# EAGLE board CT_schematic (EAGLE 7.6.0)

Size 100 x 80 mm. Coordinates in mm from the lower left corner, seen from the top.
Outline: 0,0 100,0 100,80 0,80 0,0
Copper layers (1*16): Top 0.035mm / dielectric 1.5mm / Bottom 0.035mm
Design rules "default": minimum track width 10mil, minimum drill 24mil, track to track 8mil, track to pad 8mil, pad to pad 8mil, via to via 8mil, smd to smd 8mil, copper to edge 40mil, drill to drill 8mil, minimum pad ring 10mil, minimum via ring 8mil, stop-mask expansion 4mil, vias tented up to drill 0mil, thermal gap 10mil

## Footprints (pad centres in the part's own frame; a part is rotated, then mirrored left to right if it is on the bottom)
C0603 = smd 0.8 x 0.8: 1 -0.762,0; 2 0.762,0
C0402 = smd 0.5 x 0.5: 1 -0.508,0; 2 0.508,0
C0805 = smd 1.2 x 1.3: 1 -1.016,0; 2 1.016,0
C1206 = smd 1.3 x 1.6: 1 -1.524,0; 2 1.524,0
C1210 = smd 1.2 x 2.5: 1 -1.524,0; 2 1.524,0
EXV-9H = smd 3.505 x 1.676: 1 -2.857,0; 2 2.857,0
L0603 = smd 0.8 x 0.8: 1 -0.762,0; 2 0.762,0
PJ-037B_PACKAGE = drill 3.7 square: 1 12,0 | drill 3.2 square: 2 6,0
R0603 = smd 0.8 x 0.8: 1 -0.762,0; 2 0.762,0
LQFP64 = smd 0.3 x 1.2: 1 -3.75,-5.75; 2 -3.25,-5.75; 3 -2.75,-5.75; 4 -2.25,-5.75; 5 -1.75,-5.75; 6 -1.25,-5.75; 7 -0.75,-5.75; 8 -0.25,-5.75; 9 0.25,-5.75; 10 0.75,-5.75; 11 1.25,-5.75; 12 1.75,-5.75; 13 2.25,-5.75; 14 2.75,-5.75; 15 3.25,-5.75; 16 3.75,-5.75; 33 3.75,5.75; 34 3.25,5.75; 35 2.75,5.75; 36 2.25,5.75; 37 1.75,5.75; 38 1.25,5.75; 39 0.75,5.75; 40 0.25,5.75; 41 -0.25,5.75; 42 -0.75,5.75; 43 -1.25,5.75; 44 -1.75,5.75; 45 -2.25,5.75; 46 -2.75,5.75; 47 -3.25,5.75; 48 -3.75,5.75 | smd 1.2 x 0.3: 17 5.75,-3.75; 18 5.75,-3.25; 19 5.75,-2.75; 20 5.75,-2.25; 21 5.75,-1.75; 22 5.75,-1.25; 23 5.75,-0.75; 24 5.75,-0.25; 25 5.75,0.25; 26 5.75,0.75; 27 5.75,1.25; 28 5.75,1.75; 29 5.75,2.25; 30 5.75,2.75; 31 5.75,3.25; 32 5.75,3.75; 49 -5.75,3.75; 50 -5.75,3.25; 51 -5.75,2.75; 52 -5.75,2.25; 53 -5.75,1.75; 54 -5.75,1.25; 55 -5.75,0.75; 56 -5.75,0.25; 57 -5.75,-0.25; 58 -5.75,-0.75; 59 -5.75,-1.25; 60 -5.75,-1.75; 61 -5.75,-2.25; 62 -5.75,-2.75; 63 -5.75,-3.25; 64 -5.75,-3.75
SOIC-8 = smd 1.6 x 0.6: 1 -2.7,1.905 | smd 1.55 x 0.6: 2 -2.7,0.635; 3 -2.7,-0.635; 4 -2.7,-1.905; 5 2.7,-1.905; 6 2.7,-0.635; 7 2.7,0.635; 8 2.7,1.905
LGA-16 = smd 1.5 x 0.4: 1 -2.1,0.975; 2 -2.1,0.325; 3 -2.1,-0.325; 4 -2.1,-0.975; 9 2.1,-0.975; 10 2.1,-0.325; 11 2.1,0.325; 12 2.1,0.975 | smd 0.4 x 1.5: 5 -0.975,-2.1; 6 -0.325,-2.1; 7 0.325,-2.1; 8 0.975,-2.1; 13 0.975,2.1; 14 0.325,2.1; 15 -0.325,2.1; 16 -0.975,2.1
MOLEX_47219-2001 = smd 0.8 x 1.5: 1 3.2,-2.1; 2 2.1,-2.1; 3 1,-2.1; 4 -0.1,-2.1; 5 -1.2,-2.1; 6 -2.3,-2.1; 7 -3.4,-2.1; 8 -4.5,-2.1 | smd 1.5 x 2.05: G1 6.875,-4.7; G2 6.875,3.6; G3 -6.875,3.6; G4 -6.875,-4.7
QFN-32 = smd 0.6 x 0.3: 1 -2.3,1.75; 2 -2.3,1.25; 3 -2.3,0.75; 4 -2.3,0.25; 5 -2.3,-0.25; 6 -2.3,-0.75; 7 -2.3,-1.25; 8 -2.3,-1.75; 17 2.3,-1.75; 18 2.3,-1.25; 19 2.3,-0.75; 20 2.3,-0.25; 21 2.3,0.25; 22 2.3,0.75; 23 2.3,1.25; 24 2.3,1.75 | smd 0.3 x 0.6: 9 -1.75,-2.3; 10 -1.25,-2.3; 11 -0.75,-2.3; 12 -0.25,-2.3; 13 0.25,-2.3; 14 0.75,-2.3; 15 1.25,-2.3; 16 1.75,-2.3; 25 1.75,2.3; 26 1.25,2.3; 27 0.75,2.3; 28 0.25,2.3; 29 -0.25,2.3; 30 -0.75,2.3; 31 -1.25,2.3; 32 -1.75,2.3 | smd 3.2 x 3.2: EXP 0,0
SJ-43515TS-SMT-TR = smd 2.2 x 3: 1 0.6,-7.4; 4 3.4,-7.4 | smd 3 x 3: 2 12.8,-7.4; 5 17,-3 | smd 2 x 3: 3 5.3,0; 6 2.5,0 | drill 1.8: P$7 4.5,-3.69; P$8 11.54,-3.69
WM-64PC = drill 0.6 pad 1: 1 -1,0.95; 2 -1,-0.95
ABS07-32.768KHZ-7-T = smd 1.1 x 2.4: 1 -2.5,0; 2 0,0
ABLS-25.000MHZ-B2F-T = smd 5.6 x 2.8: 1 -3.81,0; 2 5.69,0
ASFL1 = smd 1.7 x 1.5: 1 -1.27,-1.1; 2 1.27,-1.1; 3 1.27,1.1; 4 -1.27,1.1
WSON-8 = smd 0.3 x 0.6: 1 -0.75,0; 2 0.05,0; 3 0.85,0; 4 1.65,0; 5 1.65,3.8; 6 0.85,3.8; 7 0.05,3.8; 8 -0.75,3.8 | smd 3 x 2.6: PAD 0.45,1.9
SON-6 = smd 0.55 x 0.3: 1 -0.355,0.5 | smd 0.52 x 0.3: 2 -0.37,0; 3 -0.37,-0.5; 4 0.37,-0.5; 5 0.37,0; 6 0.37,0.5
SW_4-1437565-2 = smd 1.4 x 2.1: 1 -2.23,4.55; 2 -2.23,-4.55; 3 2.23,4.55; 4 2.23,-4.55
LGM67K-G1J2-24-Z = smd 0.8 x 1.4: A -2,0; C 0,0
NC7SZ125M5X = smd 1.3 x 0.7: 1 -1.3,0.95; 2 -1.3,0; 3 -1.3,-0.95; 4 1.3,-0.95; 5 1.3,0.95
DUMMY_PACKAGE_195 = drill 0.3: 1 0,-1; 2 1.5,-1; 3 3,-1

## Placement (x,y rotation side)
C1  1e-06  [C0603]  -50.8,80.01 0 top  (outside the outline)
C2  1e-07  [C0603]  -54.61,80.01 0 top  (outside the outline)
C3  1e-07  [C0603]  -58.42,80.01 0 top  (outside the outline)
C4  1e-07  [C0603]  -62.23,80.01 0 top  (outside the outline)
C5  1e-07  [C0603]  -66.04,80.01 0 top  (outside the outline)
C6  1e-07  [C0603]  -69.85,80.01 0 top  (outside the outline)
C7  4.7e-06  [C0603]  -39.37,80.01 0 top  (outside the outline)
C8  2.2e-06  [C0603]  -43.18,80.01 0 top  (outside the outline)
C9  1e-08  [C0603]  -73.66,80.01 0 top  (outside the outline)
C10  1e-06  [C0603]  -77.47,80.01 0 top  (outside the outline)
C11  1e-11  [C0402]  -80.01,85.09 0 top  (outside the outline)
C12  1e-11  [C0402]  -83.82,85.09 0 top  (outside the outline)
C13  1e-11  [C0402]  -15.24,90.17 0 top  (outside the outline)
C14  1e-11  [C0402]  -19.05,90.17 0 top  (outside the outline)
C15  1e-08  [C0402]  -22.86,90.17 0 top  (outside the outline)
C16  1e-08  [C0402]  -26.67,90.17 0 top  (outside the outline)
C17  1e-08  [C0402]  -30.48,90.17 0 top  (outside the outline)
C18  1e-08  [C0402]  -34.29,90.17 0 top  (outside the outline)
C19  4.7e-07  [C0603]  -46.99,80.01 0 top  (outside the outline)
C20  1e-07  [C0402]  -38.1,90.17 0 top  (outside the outline)
C21  1e-05  [C0805]  -78.74,67.31 0 top  (outside the outline)
C22  1e-06  [C0603]  -81.28,80.01 0 top  (outside the outline)
C23  1e-06  [C0603]  -15.24,85.09 0 top  (outside the outline)
C24  1e-06  [C0603]  -19.05,85.09 0 top  (outside the outline)
C25  1e-06  [C0603]  -22.86,85.09 0 top  (outside the outline)
C26  1e-06  [C0603]  -26.67,85.09 0 top  (outside the outline)
C27  1e-06  [C0603]  -30.48,85.09 0 top  (outside the outline)
C28  1e-06  [C0603]  -34.29,85.09 0 top  (outside the outline)
C29  1e-07  [C0402]  -41.91,90.17 0 top  (outside the outline)
C30  1e-07  [C0402]  -45.72,90.17 0 top  (outside the outline)
C31  1e-07  [C0402]  -49.53,90.17 0 top  (outside the outline)
C32  1e-07  [C0402]  -53.34,90.17 0 top  (outside the outline)
C33  1e-06  [C0603]  -38.1,85.09 0 top  (outside the outline)
C34  1e-08  [C0402]  -57.15,90.17 0 top  (outside the outline)
C35  1e-08  [C0402]  -60.96,90.17 0 top  (outside the outline)
C36  1e-05  [C1206]  -60.96,67.31 0 top  (outside the outline)
C37  1e-05  [C0805]  -15.24,74.93 0 top  (outside the outline)
C38  1e-08  [C0402]  -64.77,90.17 0 top  (outside the outline)
C39  1e-05  [C1206]  -67.31,67.31 0 top  (outside the outline)
C40  1e-05  [C1210]  -54.61,67.31 0 top  (outside the outline)
C41  1e-07  [C0402]  -68.58,90.17 0 top  (outside the outline)
C42  0.0001  [EXV-9H]  -36.83,58.42 0 top  (outside the outline)
C43  0.0001  [EXV-9H]  -48.26,58.42 0 top  (outside the outline)
C44  1e-08  [C0402]  -72.39,90.17 0 top  (outside the outline)
F1  240.0  [L0603]  -41.91,85.09 0 top  (outside the outline)
J1  PJ-037B  [PJ-037B_PACKAGE]  -83.82,24.13 0 top  (outside the outline)
R2  1000.0  [R0603]  -45.72,85.09 0 top  (outside the outline)
R4  4700.0  [R0603]  -49.53,85.09 0 top  (outside the outline)
R5  10000.0  [R0603]  -71.12,74.93 0 top  (outside the outline)
R6  10000.0  [R0603]  -76.2,74.93 0 top  (outside the outline)
R7  10000.0  [R0603]  -81.28,74.93 0 top  (outside the outline)
R8  10000.0  [R0603]  -15.24,80.01 0 top  (outside the outline)
R9  10000.0  [R0603]  -20.32,80.01 0 top  (outside the outline)
R10  10000.0  [R0603]  -25.4,80.01 0 top  (outside the outline)
R11  100000.0  [R0603]  -20.32,74.93 0 top  (outside the outline)
R12  100000.0  [R0603]  -25.4,74.93 0 top  (outside the outline)
R13  100000.0  [R0603]  -30.48,74.93 0 top  (outside the outline)
R14  100000.0  [R0603]  -35.56,74.93 0 top  (outside the outline)
R15  100000.0  [R0603]  -40.64,74.93 0 top  (outside the outline)
R16  100000.0  [R0603]  -45.72,74.93 0 top  (outside the outline)
R17  1270.0  [R0603]  -53.34,85.09 0 top  (outside the outline)
R18  1270.0  [R0603]  -57.15,85.09 0 top  (outside the outline)
R19  100000.0  [R0603]  -50.8,74.93 0 top  (outside the outline)
R20  200.0  [R0603]  -60.96,85.09 0 top  (outside the outline)
R21  1000.0  [R0603]  -64.77,85.09 0 top  (outside the outline)
R22  100000.0  [R0603]  -55.88,74.93 0 top  (outside the outline)
R23  2231.0  [R0603]  -68.58,85.09 0 top  (outside the outline)
R24  1000.0  [R0603]  -72.39,85.09 0 top  (outside the outline)
R25  10000.0  [R0603]  -30.48,80.01 0 top  (outside the outline)
R26  10000.0  [R0603]  -35.56,80.01 0 top  (outside the outline)
R27  9100.0  [R0603]  -76.2,85.09 0 top  (outside the outline)
R28  680000.0  [R0603]  -60.96,74.93 0 top  (outside the outline)
R29  120000.0  [R0603]  -66.04,74.93 0 top  (outside the outline)
U1  STM32F401RDT6  [LQFP64]  -24.13,38.1 0 top  (outside the outline)
U2  AT25320B-SSHL-T  [SOIC-8]  -24.13,49.53 0 top  (outside the outline)
U3  l3g4200d  [LGA-16]  -35.56,68.58 0 top  (outside the outline)
U4  0472192001  [MOLEX_47219-2001]  -22.86,8.89 0 top  (outside the outline)
U5  SGTL5000XNAA3  [QFN-32]  -71.12,36.83 0 top  (outside the outline)
U6  SJ-43515TS-SMT-TR  [SJ-43515TS-SMT-TR]  -59.69,10.16 0 top  (outside the outline)
U7  SJ-43515TS-SMT-TR  [SJ-43515TS-SMT-TR]  -39.37,26.67 0 top  (outside the outline)
U8  SJ-43515TS-SMT-TR  [SJ-43515TS-SMT-TR]  -67.31,26.67 0 top  (outside the outline)
U9  WM-64PCT  [WM-64PC]  -57.15,36.83 0 top  (outside the outline)
U10  ABS07-32.768KHZ-7-T  [ABS07-32.768KHZ-7-T]  -27.94,68.58 0 top  (outside the outline)
U11  ABLS-25.000MHZ-B2F-T  [ABLS-25.000MHZ-B2F-T]  -67.31,58.42 0 top  (outside the outline)
U12  ASFL-24.57MHZ-NCS  [ASFL1]  -27.94,59.69 0 top  (outside the outline)
U13  LP3878SDX-ADJ/NOPB  [WSON-8]  -45.72,48.26 0 top  (outside the outline)
U14  LP3878SDX-ADJ/NOPB  [WSON-8]  -66.04,48.26 0 top  (outside the outline)
U15  TPS3895ADRYR  [SON-6]  -81.28,88.9 0 top  (outside the outline)
U16  4-1437565-2  [SW_4-1437565-2]  -45.72,38.1 0 top  (outside the outline)
U17  Q65110A2395  [LGM67K-G1J2-24-Z]  -43.18,67.31 0 top  (outside the outline)
U18  nc7sz125m5x  [NC7SZ125M5X]  -72.39,66.04 0 top  (outside the outline)
U19  Dummy  [DUMMY_PACKAGE_195]  -78.74,90.17 0 top  (outside the outline)

## Library data of the parts
C1-C44 F1 J1 R2 R4-R29 U1-U19 = circuit_tree

## Nets
CLK_CRYSTAL_U1_3: C11.1 U1.3 U10.1
CLK_CRYSTAL_U1_4: C12.1 U1.4 U10.2
CLK_CRYSTAL_U1_5: C13.1 U1.5 U11.1
CLK_CRYSTAL_U1_6: C14.1 U1.6 U11.2
CLK_U5_21: U5.21 U12.3
GND: C1.2 C2.2 C3.2 C4.2 C5.2 C6.2 C7.2 C8.2 C9.2 C10.2 C11.2 C12.2 C13.2 C14.2 C15.2 C16.2 C17.2 C18.2 C20.2 C21.2 C29.2 C30.2 C31.2 C32.2 C33.2 C34.2 C35.2 C36.2 C37.2 C38.2 C39.2 C40.2 C41.2 C42.2 C43.2 C44.2 J1.2 R2.2 R5.2 R9.1 R9.2 R18.2 R21.2 R24.2 R27.2 R29.2 U1.12 U1.18 U1.31 U1.47 U1.63 U2.4 U3.8 U3.9 U3.10 U3.11 U3.12 U3.13 U4.6 U4.G1 U4.G2 U4.G3 U4.G4 U5.1 U5.3 U5.7 U5.EXP U7.1 U8.1 U9.2 U12.2 U13.3 U13.PAD U14.3 U14.PAD U15.2 U17.C U18.1 U18.3 U19.1
NET_U1_7: R4.1 U1.7 U18.4
NET_U1_13: C9.1 C10.1 F1.1 U1.13
NET_U1_30: C8.1 U1.30
NET_U1_59: U17.A
NET_U1_60: R5.1 U1.60
NET_U1_61: U16.3 U16.4
NET_U2_3: R6.1 U2.3
NET_U2_7: R8.1 U2.7
NET_U3_14: C18.1 C19.1 U3.14
NET_U3_ATNET_1: C19.2
NET_U5_10: C32.1 U5.10
NET_U5_29: R17.1 U5.29
NET_U5_31: R18.1 U5.31
NET_U6_1: U5.4 U6.1
NET_U6_2: U5.2 U6.2
NET_U6_5: U5.6 U6.5
NET_U7_2: C23.1 U7.2
NET_U7_5: C22.1 U7.5
NET_U7_11: C23.2
NET_U7_12: C22.2
NET_U8_2: C25.1 C26.1 U8.2
NET_U8_5: C24.1 U8.5
NET_U8_13: C25.2 C26.2
NET_U8_14: C24.2
NET_U9_1: C27.1 C28.1 C33.1 U5.16 U9.1
NET_U9_15: C27.2 C28.2
NET_U13_1: C35.1 U13.1
NET_U13_6: R20.2 R21.1 U13.6
NET_U13_8: R19.1 U13.8
NET_U14_1: C38.1 U14.1
NET_U14_6: R23.2 R24.1 U14.6
NET_U14_8: R22.1 U14.8
NET_U15_1: R26.1 R27.1 U15.1
NET_U15_3: R28.2 R29.1 U15.3
NET_U15_4: R25.1 U15.4 U18.2
NET_U16_1: R2.1 U16.1 U16.2
PROC_ADC1_IN1: U1.15 U19.3
PROC_ADC1_IN2: U1.16 U19.2
PROC_I2S2_CK: U1.34 U5.24
PROC_I2S2_EXT_SD: U1.35 U5.25
PROC_I2S2_SD: U1.36 U5.26
PROC_I2S2_WS: U1.62 U5.23
PROC_SDIO_CK: R12.1 U1.53 U4.5
PROC_SDIO_CMD: R11.1 U1.54 U4.3
PROC_SDIO_D0: R13.1 U1.39 U4.7
PROC_SDIO_D1: R14.1 U1.40 U4.8
PROC_SDIO_D2: R15.1 U1.51 U4.1
PROC_SDIO_D3: R16.1 U1.52 U4.2
PROC_SPI1_MISO: U1.22 U3.4
PROC_SPI1_MOSI: U1.23 U3.3
PROC_SPI1_NSS: R10.1 U1.20 U3.5
PROC_SPI1_SCK: U1.21 U3.2
PROC_SPI2_MISO: U1.10 U2.2
PROC_SPI2_MOSI: U1.11 U2.5
PROC_SPI2_NSS: R7.1 U1.33 U2.1
PROC_SPI2_SCK: U1.29 U2.6
VCC_S1_9V6: C36.1 C39.1 C42.1 C43.1 J1.1 R19.2 R22.2 U13.4 U14.4
VCC_TIER1_1V2: C29.1 C37.1 R20.1 U5.30 U13.5
VCC_TIER1_3V3: C1.1 C2.1 C3.1 C4.1 C5.1 C6.1 C7.1 C15.1 C16.1 C17.1 C20.1 C21.1 C30.1 C31.1 C34.1 C40.1 C41.1 C44.1 F1.2 R4.2 R6.2 R7.2 R8.2 R10.2 R11.2 R12.2 R13.2 R14.2 R15.2 R16.2 R17.2 R23.1 R25.2 R26.2 R28.1 U1.1 U1.19 U1.32 U1.48 U1.64 U2.8 U3.1 U3.15 U3.16 U4.4 U5.5 U5.20 U12.4 U14.5 U15.6 U18.5

## Tracks (layer width: path | path; a pad name or v marks a point on that pad's centre or on a via)
CLK_CRYSTAL_U1_3  (2 unrouted)
CLK_CRYSTAL_U1_4  (2 unrouted)
CLK_CRYSTAL_U1_5  (2 unrouted)
CLK_CRYSTAL_U1_6  (2 unrouted)
CLK_U5_21  (1 unrouted)
GND  (79 unrouted)
NET_U1_7  (2 unrouted)
NET_U1_13  (3 unrouted)
NET_U1_30  (1 unrouted)
NET_U1_60  (1 unrouted)
NET_U1_61  (1 unrouted)
NET_U2_3  (1 unrouted)
NET_U2_7  (1 unrouted)
NET_U3_14  (2 unrouted)
NET_U5_10  (1 unrouted)
NET_U5_29  (1 unrouted)
NET_U5_31  (1 unrouted)
NET_U6_1  (1 unrouted)
NET_U6_2  (1 unrouted)
NET_U6_5  (1 unrouted)
NET_U7_2  (1 unrouted)
NET_U7_5  (1 unrouted)
NET_U8_2  (2 unrouted)
NET_U8_5  (1 unrouted)
NET_U8_13  (1 unrouted)
NET_U9_1  (4 unrouted)
NET_U9_15  (1 unrouted)
NET_U13_1  (1 unrouted)
NET_U13_6  (2 unrouted)
NET_U13_8  (1 unrouted)
NET_U14_1  (1 unrouted)
NET_U14_6  (2 unrouted)
NET_U14_8  (1 unrouted)
NET_U15_1  (2 unrouted)
NET_U15_3  (2 unrouted)
NET_U15_4  (2 unrouted)
NET_U16_1  (2 unrouted)
PROC_ADC1_IN1  (1 unrouted)
PROC_ADC1_IN2  (1 unrouted)
PROC_I2S2_CK  (1 unrouted)
PROC_I2S2_EXT_SD  (1 unrouted)
PROC_I2S2_SD  (1 unrouted)
PROC_I2S2_WS  (1 unrouted)
PROC_SDIO_CK  (2 unrouted)
PROC_SDIO_CMD  (2 unrouted)
PROC_SDIO_D0  (2 unrouted)
PROC_SDIO_D1  (2 unrouted)
PROC_SDIO_D2  (2 unrouted)
PROC_SDIO_D3  (2 unrouted)
PROC_SPI1_MISO  (1 unrouted)
PROC_SPI1_MOSI  (1 unrouted)
PROC_SPI1_NSS  (2 unrouted)
PROC_SPI1_SCK  (1 unrouted)
PROC_SPI2_MISO  (1 unrouted)
PROC_SPI2_MOSI  (1 unrouted)
PROC_SPI2_NSS  (2 unrouted)
PROC_SPI2_SCK  (1 unrouted)
VCC_S1_9V6  (8 unrouted)
VCC_TIER1_1V2  (4 unrouted)
VCC_TIER1_3V3  (50 unrouted)